# EAGLE board coil (EAGLE 7.4.0)
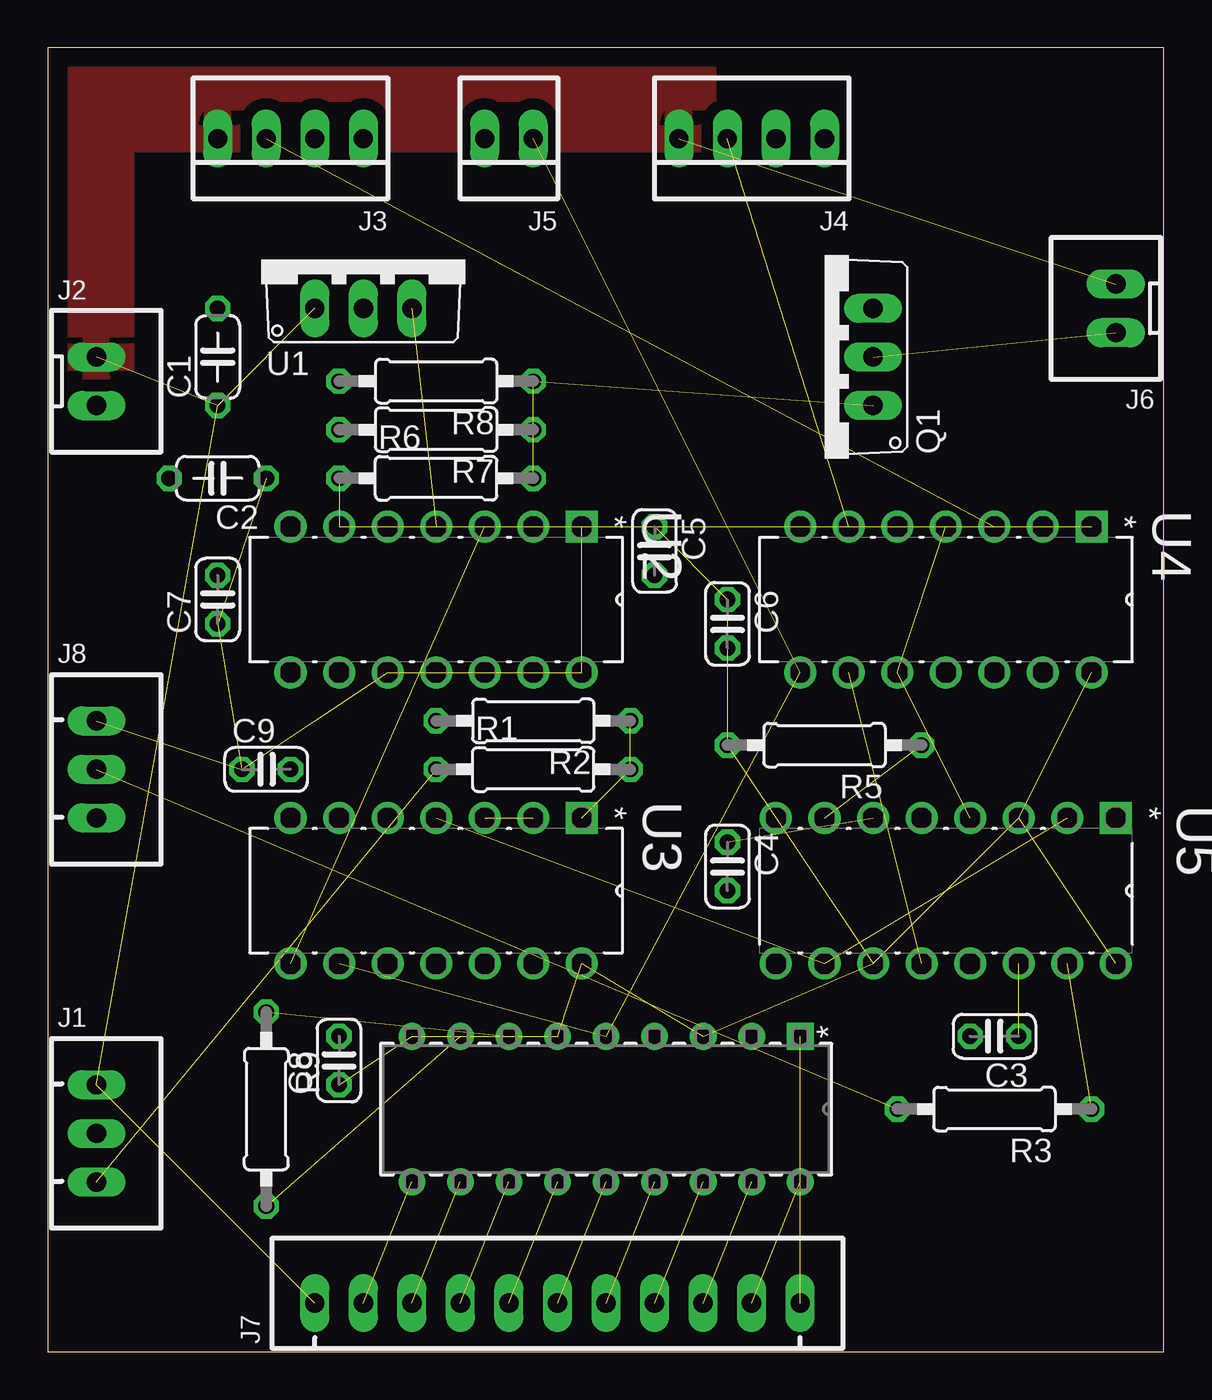
[diagram p0: board, top side]
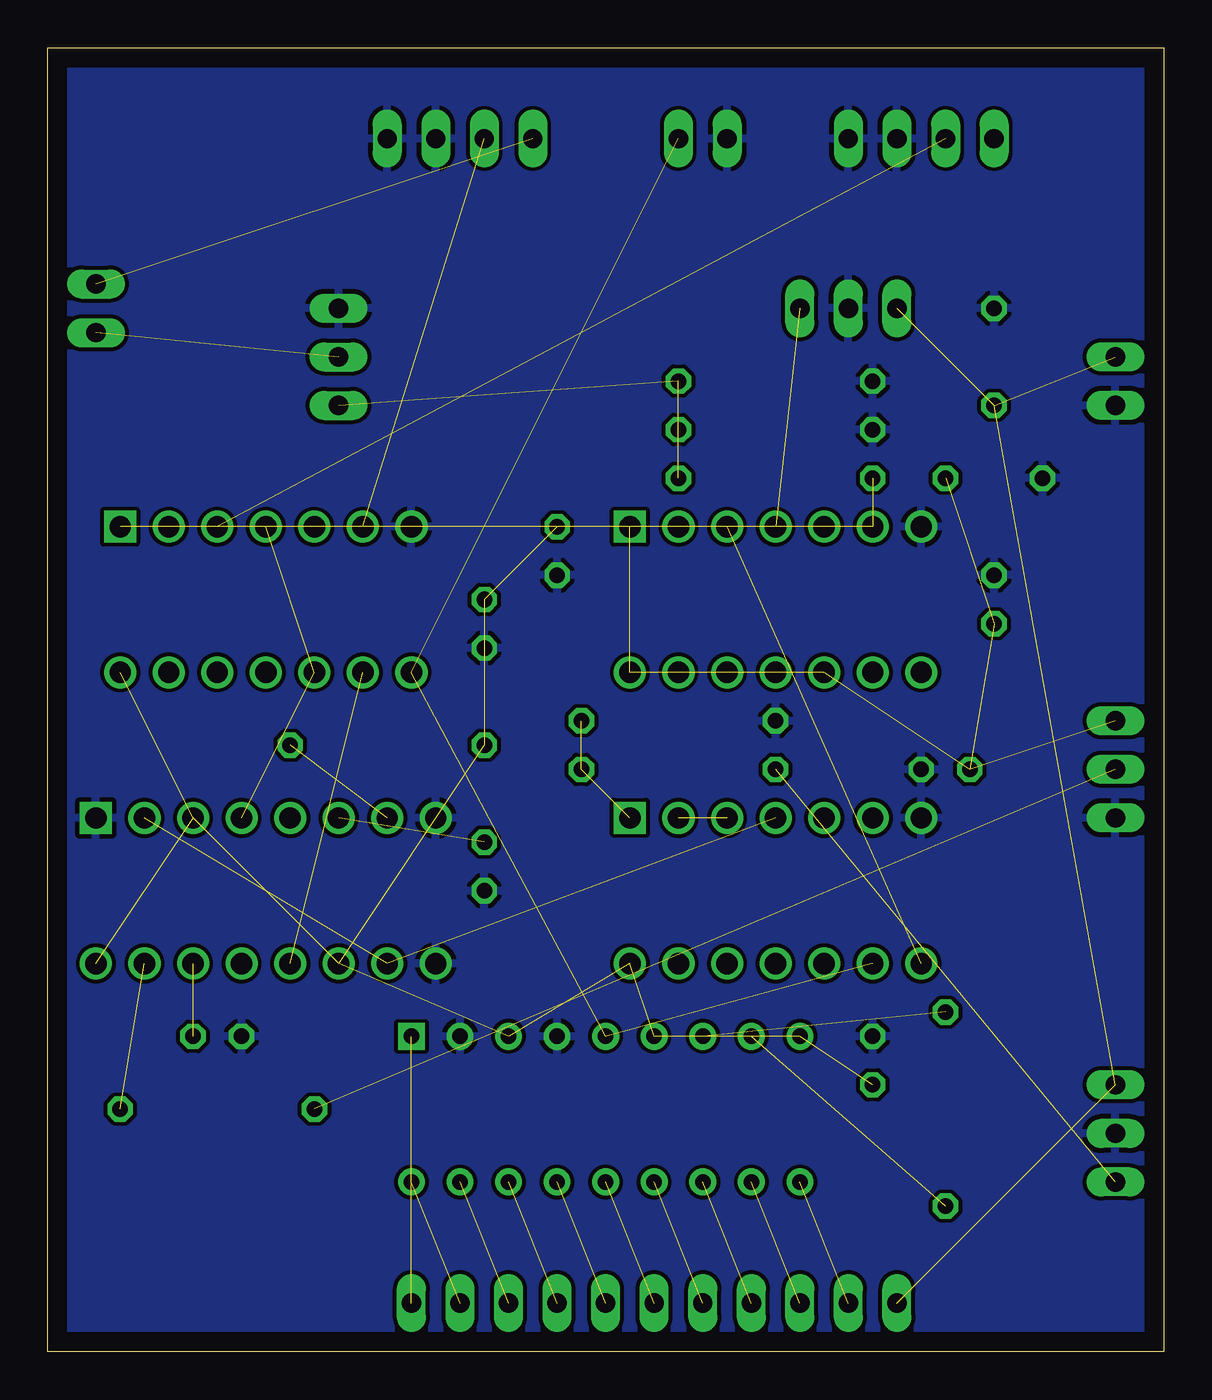
[diagram p1: board, bottom side, seen from below]

Size 58.4 x 68.25 mm. Coordinates in mm from the lower left corner, seen from the top.
Outline: 0,0 58.4,0 58.4,68.25 0,68.25 0,0
Copper layers (1*16): Top 0.035mm / dielectric 1.5mm / Bottom 0.035mm
Design rules "default": minimum track width 10mil, minimum drill 24mil, track to track 8mil, track to pad 8mil, pad to pad 8mil, via to via 8mil, smd to smd 8mil, copper to edge 40mil, drill to drill 8mil, minimum pad ring 10mil, minimum via ring 8mil, stop-mask expansion 4mil, vias tented up to drill 0mil, thermal gap 10mil

## Footprints (pad centres in the part's own frame; a part is rotated, then mirrored left to right if it is on the bottom)
C050-024X044 = drill 0.813 octagon: 1 -2.54,0; 2 2.54,0
C025-024X044 = drill 0.813 octagon: 1 -1.27,0; 2 1.27,0
JST-XH-03-PACKAGE-LONG-PAD = drill 1.016 long: 1 -2.54,0; 2 0,0; 3 2.54,0
JST-XH-02-PACKAGE-LONG-PAD = drill 1.016 long: 1 -1.27,0; 2 1.27,0
22-23-2041 = drill 1 long: 1 -3.81,0; 2 -1.27,0; 3 1.27,0; 4 3.81,0
22-23-2021 = drill 1 long: 1 -1.27,0; 2 1.27,0
JST-XH-11-PACKAGE-LONG-PAD = drill 1.016 long: 1 -12.7,0; 2 -10.16,0; 3 -7.62,0; 4 -5.08,0; 5 -2.54,0; 6 0,0; 7 2.54,0; 8 5.08,0; 9 7.62,0; 10 10.16,0; 11 12.7,0
TO220V = drill 1.016 long: 1 -2.54,-2.54; 2 0,-2.54; 3 2.54,-2.54
0207/10 = drill 0.813 octagon: 1 -5.08,0; 2 5.08,0
DIP254P762X420-14 = drill 1.118 square: 1 -7.62,15.24 | drill 1.118: 2 -7.62,12.7; 3 -7.62,10.16; 4 -7.62,7.62; 5 -7.62,5.08; 6 -7.62,2.54; 7 -7.62,0; 8 0,0; 9 0,2.54; 10 0,5.08; 11 0,7.62; 12 0,10.16; 13 0,12.7; 14 0,15.24
DIP254P762X420-16 = drill 1.118 square: 1 -7.62,17.78 | drill 1.118: 2 -7.62,15.24; 3 -7.62,12.7; 4 -7.62,10.16; 5 -7.62,7.62; 6 -7.62,5.08; 7 -7.62,2.54; 8 -7.62,0; 9 0,0; 10 0,2.54; 11 0,5.08; 12 0,7.62; 13 0,10.16; 14 0,12.7; 15 0,15.24; 16 0,17.78
NA18A_TEX = drill 0.813 pad 1.397 square: 1 0,0 | drill 0.813 pad 1.397: 2 0,-2.54; 3 0,-5.08; 4 0,-7.62; 5 0,-10.16; 6 0,-12.7; 7 0,-15.24; 8 0,-17.78; 9 0,-20.32; 10 7.62,-20.32; 11 7.62,-17.78; 12 7.62,-15.24; 13 7.62,-12.7; 14 7.62,-10.16; 15 7.62,-7.62; 16 7.62,-5.08; 17 7.62,-2.54; 18 7.62,0

## Placement (x,y rotation side)
C1  0.33µF  [C050-024X044]  8.89,52.07 90 top
C2  0.1µF  [C050-024X044]  8.89,45.72 180 top
C3  100nF  [C025-024X044]  49.53,16.51 180 top
C4  100nF  [C025-024X044]  35.56,25.4 270 top
C5  100nF  [C025-024X044]  31.75,41.91 270 top
C6  100nF  [C025-024X044]  35.56,38.1 270 top
C7  100nF  [C025-024X044]  8.89,39.37 90 top
C8  100nF  [C025-024X044]  15.24,15.24 90 top
C9  100nF  [C025-024X044]  11.43,30.48 0 top
J1  JST-XH-03-PIN  [JST-XH-03-PACKAGE-LONG-PAD]  2.54,11.43 270 top
J2  JST-XH-02-PIN  [JST-XH-02-PACKAGE-LONG-PAD]  2.54,50.8 270 top
J3  Header 4  [22-23-2041]  12.7,63.5 180 top
J4  Header 4  [22-23-2041]  36.83,63.5 180 top
J5  Header 2  [22-23-2021]  24.13,63.5 180 top
J6  JST-XH-02-PIN  [JST-XH-02-PACKAGE-LONG-PAD]  55.88,54.61 90 top
J7  JST-XH-11-PIN  [JST-XH-11-PACKAGE-LONG-PAD]  26.67,2.54 0 top
J8  JST-XH-03-PIN  [JST-XH-03-PACKAGE-LONG-PAD]  2.54,30.48 270 top
Q1  IRLZ44N  [TO220V]  40.64,52.07 90 top
R1  15kΩ  [0207/10]  25.4,30.48 0 top
R2  10kΩ  [0207/10]  25.4,33.02 180 top
R3  10kΩ  [0207/10]  49.53,12.7 180 top
R5  180kΩ  [0207/10]  40.64,31.75 180 top
R6  100Ω  [0207/10]  20.32,45.72 0 top
R7  10kΩ  [0207/10]  20.32,48.26 180 top
R8  100kΩ  [0207/10]  20.32,50.8 180 top
R9  1.2kΩ  [0207/10]  11.43,12.7 270 top
U1  LM7805  [TO220V]  16.51,57.15 0 top
U2  74HC74N  [DIP254P762X420-14]  12.7,35.56 270 top
U3  74HC14N  [DIP254P762X420-14]  12.7,20.32 270 top
U4  74HC08N  [DIP254P762X420-14]  39.37,35.56 270 top
U5  74HC123N  [DIP254P762X420-16]  38.1,20.32 270 top
U6  LM3914N  [NA18A_TEX]  39.37,16.51 270 top

## Library data of the parts
C1-C9 R1-R3 R5-R9 = rcl
J1 J2 J6-J8 = JST XH Connectors
J3 J4 = con-molex; MF: MOLEX; MPN: 22-23-2041; OC_FARNELL: 1462920; OC_NEWARK: 38C0355
J5 = con-molex; MF: MOLEX; MPN: 22-23-2021; OC_FARNELL: 1462926; OC_NEWARK: 25C3832
Q1 = adafruit
U1 = linear
U2 = NXP_By_element14_Batch_1; MPN: 74HC74N,652; OC_FARNELL: 1826801; OC_NEWARK: 71R2752; PACKAGE: DIP-14; SUPPLIER: NXP
U3 = NXP_By_element14_Batch_1; MPN: 74HC14N,652; OC_FARNELL: 1826781; OC_NEWARK: 71R2054; PACKAGE: DIP-14; SUPPLIER: NXP
U4 = NXP_By_element14_Batch_1; MPN: 74HC08N,652; OC_FARNELL: 1826777; OC_NEWARK: 71R1931; PACKAGE: DIP-14; SUPPLIER: NXP
U5 = NXP_By_element14_Batch_1; MPN: 74HC123N; OC_FARNELL: 380519; OC_NEWARK: 07WX3666; PACKAGE: DIP-16; SUPPLIER: NXP
U6 = lm3194n; COPYRIGHT: Copyright (C) 2026 Ultra Librarian. All rights reserved.; MANUFACTURER_NAME: Texas Instruments; MANUFACTURER_PART_NUMBER: LM3914N-1

## Nets
+05V: C2.1 C5.1 C6.1 C7.1 C8.1 C9.1 J8.1 R5.2 U1.3 U2.1 U2.4 U2.10 U2.13 U2.14 U3.14 U4.14 U5.3 U5.11 U5.16 U6.3 U6.6 U6.9
+12V: C1.1 J1.1 J2.1 J3.4 J4.4 J6.2 J7.1 U1.1
ADJ_Q: U4.1 U4.4 U4.10 U5.4
CLK_SIGNAL: U2.3 U3.8
COIL1_TRIG: J3.3 U4.3
COIL2_TRIG: J4.3 U4.6
DWELL_PULSE: J5.1 U3.9 U4.8 U6.5
GND: C1.2 C2.2 C3.2 C4.2 C5.2 C6.2 C7.2 C8.2 C9.2 J1.2 J2.2 J3.1 J3.2 J4.1 J4.2 J5.2 J8.3 Q1.3 R2.2 R7.2 R8.2 U1.2 U2.7 U3.7 U4.7 U5.1 U5.8 U5.9 U6.2 U6.4
INV1: U3.2 U3.3
LIMIT_Q: U4.9 U5.12
N$1: R1.2 R2.1 U3.1
N$2: U3.4 U5.2 U5.10
N$3: C4.1 U5.6
N$4: R5.1 U5.7
N$5: C3.1 U5.14
N$6: R3.1 U5.15
N$7: Q1.1 R6.2 R7.1 R8.1
N$8: J7.11 U6.1
N$9: R9.1 U6.7
N$10: R9.2 U6.8
N$11: J7.2 U6.10
N$12: J7.3 U6.11
N$13: J7.4 U6.12
N$14: J7.5 U6.13
N$15: J7.6 U6.14
N$16: J7.7 U6.15
N$17: J7.8 U6.16
N$18: J7.9 U6.17
N$19: J7.10 U6.18
N$20: J8.2 R3.2
Q: U2.5 U4.2
Q_NOT: R6.1 U2.2 U2.6 U4.5
RELAY_DRIVE: J6.1 Q1.2
SENSOR_OUT: J1.3 R1.1

## Tracks (layer width: path | path; a pad name or v marks a point on that pad's centre or on a via)
+05V  (21 unrouted)
+12V  (5 unrouted)
  pour Top (isolate 0.61): 3.81,50.8 3.81,63.5 34.29,63.5 34.29,67.31 1.27,67.31 1.27,50.8
ADJ_Q  (3 unrouted)
CLK_SIGNAL  (1 unrouted)
COIL1_TRIG  (1 unrouted)
COIL2_TRIG  (1 unrouted)
DWELL_PULSE  (3 unrouted)
GND
  pour Bottom: 0,68.58 59.69,68.58 59.69,0 0,0
INV1  (1 unrouted)
LIMIT_Q  (1 unrouted)
N$1  (2 unrouted)
N$2  (2 unrouted)
N$3  (1 unrouted)
N$4  (1 unrouted)
N$5  (1 unrouted)
N$6  (1 unrouted)
N$7  (3 unrouted)
N$8  (1 unrouted)
N$9  (1 unrouted)
N$10  (1 unrouted)
N$11  (1 unrouted)
N$12  (1 unrouted)
N$13  (1 unrouted)
N$14  (1 unrouted)
N$15  (1 unrouted)
N$16  (1 unrouted)
N$17  (1 unrouted)
N$18  (1 unrouted)
N$19  (1 unrouted)
N$20  (1 unrouted)
Q  (1 unrouted)
Q_NOT  (3 unrouted)
RELAY_DRIVE  (1 unrouted)
SENSOR_OUT  (1 unrouted)